# Altium PCB UCC28180 Power Board.PcbDoc
Units mil, origin at the board's own origin, x right, y up, seen from the top; angles counter-clockwise.
Board outline 5303.93 x 3160.03 mil, 2 copper layers (Top Layer, Bottom Layer); 55 components, 25 nets, 123 pads, 14 vias.
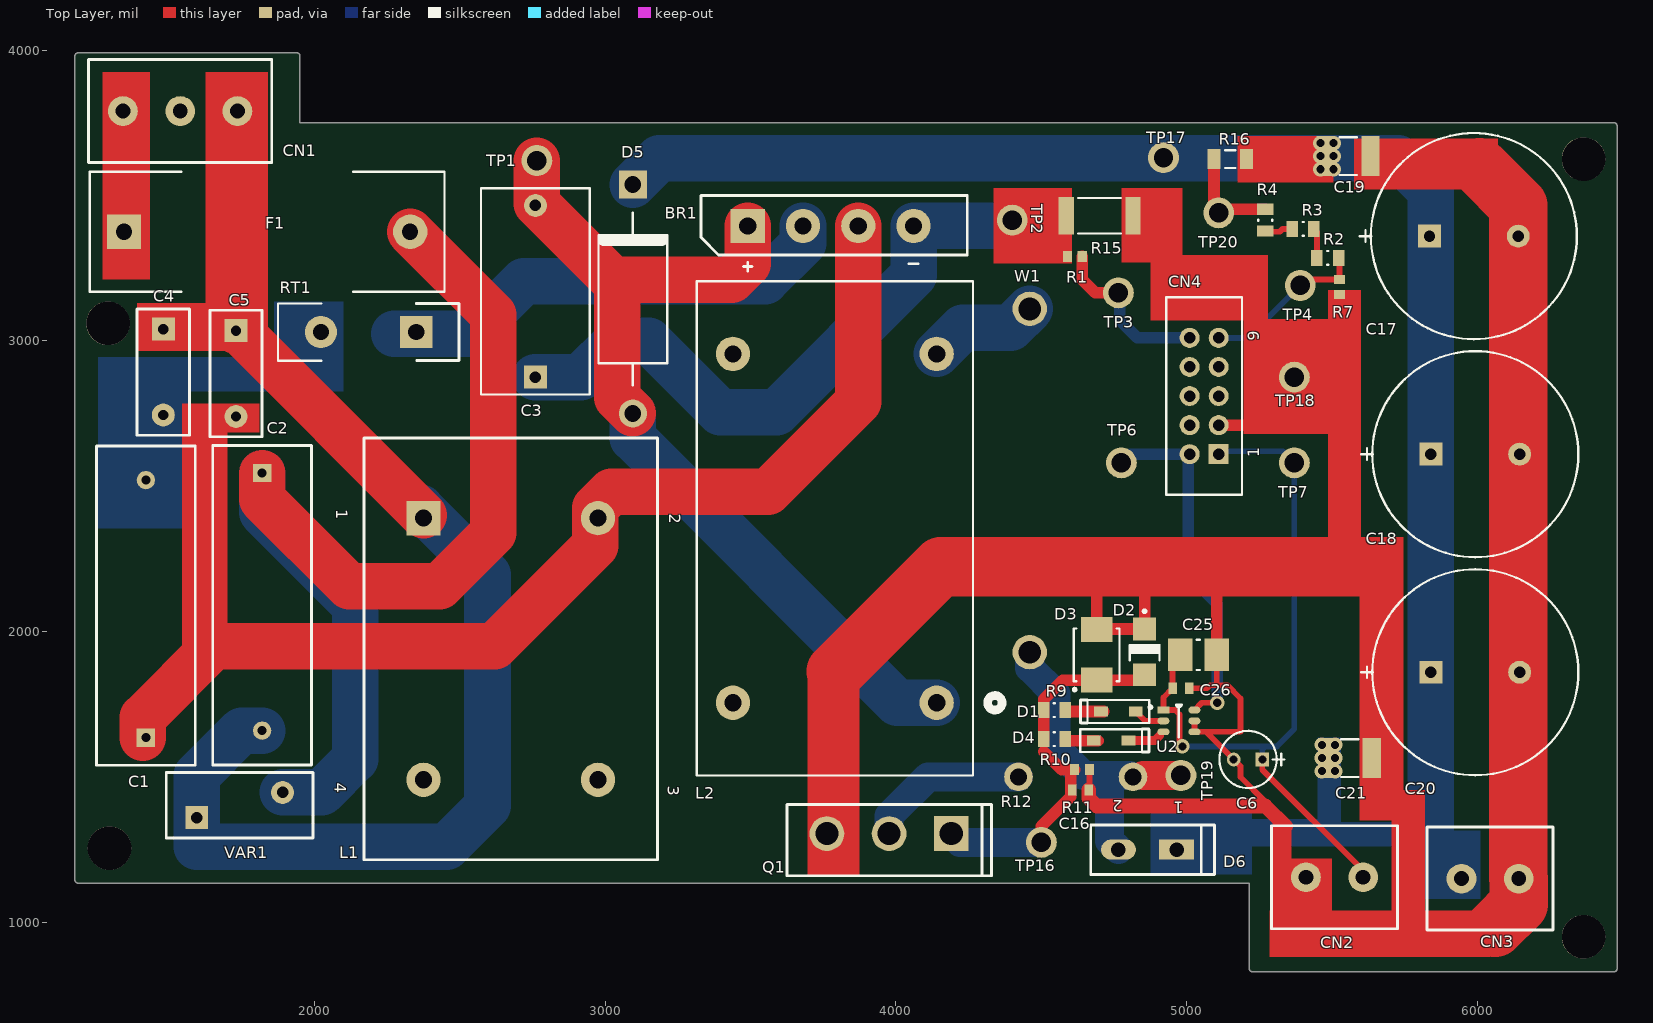
[diagram p0: Top Layer view]
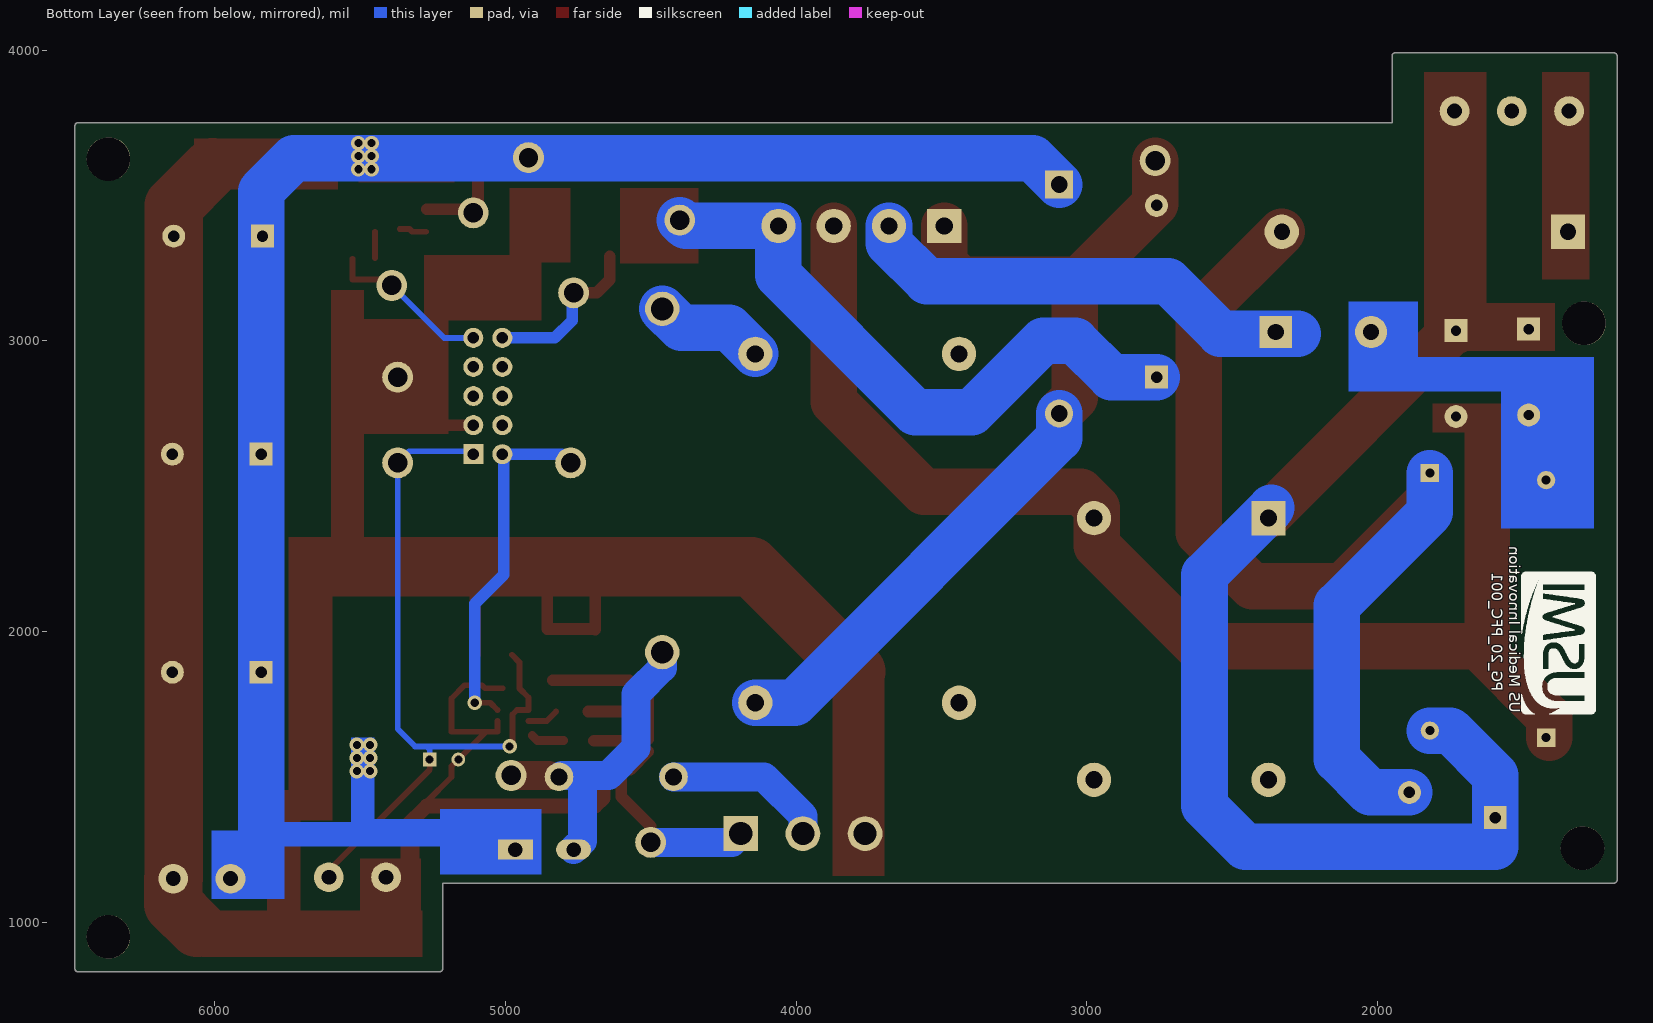
[diagram p1: Bottom Layer view, seen from below]

## Layer stack, top to bottom
Top Solder: solder mask 0.4, Solder Resist, Dk 3.5
Top Layer: signal copper 1.4
Dielectric 1: dielectric 12.6, FR-4, Dk 4.8
Bottom Layer: signal copper 1.4
Bottom Solder: solder mask 0.4, Solder Resist, Dk 3.5

## Board outline
1176.09,1145 1176.09,3980 cw(c1186.1,3980) 1186.65,3990 cw(c1187.2,3980) 1187.2,3990.01 1940,3990.01 cw(c1940,3980) 1950.02,3980 1950.02,3750.01 6470,3750.01 cw(c6470,3740) 6480.02,3740 6480.02,840 cw(c6470,840) 6470,829.99 5225,829.99 cw(c5225,840) 5214.98,840 5214.98,1134.98 1186.1,1134.98 cw(c1186.1,1145)

## Design rules (kind name [scope] priority, off if disabled: settings)
Clearance [All] p1: gap=10
ComponentClearance [All] p1 off: gap=10 collisioncheckmode=3 verticalgap=10 showdistances=FALSE
PolygonConnect [All] p1: connectstyle=Relief reliefconductorwidth=10 reliefentries=4 polygonreliefangle="90 Angle" airgapwidth=10
RoutingVias [All] p1: holewidth=28 width=50 viastyle="Through Hole" minholewidth=28 minwidth=50 maxholewidth=28 maxwidth=50
SolderMaskExpansion [All] p1: expansion=4
Width [All] p1: maxlimit=300 minlimit=10 preferedwidth=10 minimp=50.000000 maximp=50.000000 favimp=50.000000
29 further rules are at their usual default settings.

## Classes and differential pairs
component class "Top Sheet_Power System": CN4 TP3 TP4 TP6 TP7
component class "U_Boost Converter Circuit": C6 C17 C18 C19 C20 C21 CN2 CN3 D5 D6 L2 Q1 R1 R2 R3 R4 R7 R12 R15 R16 TP16 TP17 TP18 TP19 TP20 W1
component class "U_EMI Filter": BR1 C1 C2 C3 C4 C5 CN1 F1 L1 RT1 TP1 TP2 VAR1
component class "U_MOSFET Driver": C16 C25 C26 D1 D2 D3 D4 R9 R10 R11 U2

## Components (designator, comment, footprint, x,y, rotation, side; value= is the part's Value field where it differs from the comment)
BR1 "GBU8J-BP" GBU8J 3490,3395 r0 top
C1 "ECQ-U2A474ML" ECQ-U2A474ML 1420,1635 r90 top
C2 "ECQ-U2A474ML" ECQ-U2A474ML 1820,2545 r270 top
C3 "ECQ-U2A334ML" CAPFILM0.33U 2760,2875 r90 top
C4 "CS11-E2GA222MYNS" CS11-E2GA222MYNS 1480,3040 r270 top
C5 "CS11-E2GA222MYNS" CS11-E2GA222MYNS 1730,3035 r270 top
C6 "ECA-1VM470" CAPALUM47U 5260,1560 r180 top
C16 "10nF" CAP0603 4635,1455 r180 top
C17 "450QXW120MEFC18X31.5" 450QXW120MEFC18X31.5 5835,3360 r0 top
C18 "450QXW120MEFC18X31.5" 450QXW120MEFC18X31.5 5840,2610 r0 top
C19 "GRM43DR72J104KW01L" CAP1812 5555,3635 r180 top
C20 "450QXW120MEFC18X31.5" 450QXW120MEFC18X31.5 5840,1860 r0 top
C21 "GRM43DR72J104KW01L" CAP1812 5560,1565 r180 top
C25 "GRM32RR71H105KA01K" CAP1210 5040,1920 r180 top
C26 "06035C104KAT2A" CAP0603 4980,1805 r180 top
CN1 "1935789" CONN_1935789 1735,3790 r180 top
CN2 "1935776" CONN_1935776 5410,1155 r0 top
CN3 "1935776" CONN_1935776 5945,1150 r0 top
CN4 "MSPV10-ND" MSV10-ND 5060,2810 r90 top
D1 "DB2W40300L" Mini2-F3-B 4765,1725 r180 top
D2 "1SMA12CAT3G" ONSC-SMA-2-403D-02_F_V 4855,1930 r270 top
D3 "1SMB5927BT3G" ONSC-SMB-2-403A-03_H_V 4690,1920 r90 top
D4 "DB2W40300L" Mini2-F3-B 4740,1625 r0 top
D5 "1N5406RLG" 1N5406-DO201AD 3095,2750 r90 top
D6 "C3D04060A" C3D04060A 4965,1250 r180 top
F1 "FUSE" 0031.8211 1345,3375 r0 top
L1 "8113-RC" 8113-RC 2375,2390 r270 top
L2 "51-1785LF" G-51-185LF 4140,1755 r90 top
Q1 "C3M0065090D" TO-247-3 4190,1305 r180 top
R1 "CRCW0603221RFKEA" RES0603 4615,3290 r0 top
R2 "CRCW0805340KFKEA" RES0805 5485,3285 r0 top
R3 "CRCW0805332KFKEA" RES0805 5400,3385 r0 top
R4 "CRCW0805332KFKEA" RES0805 5270,3415 r270 top
R7 "CRCW060313K3FKEA" RES0603 5525,3185 r270 top
R9 "CRCW0805R10" RES0805 4545,1730 r0 top
R10 "CRCW0805R4.99" RES0805 4545,1630 r0 top
R11 "CRCW0603RES10K" RES0603 4640,1525 r0 top
R12 "CRCWRSHUNT" Wire-Sense 4815,1500 r180 top
R15 "CRCW2512R0.027" RES2512 4700,3430 r180 top
R16 "CRCW120649R9FKEA" RES1206 5150,3625 r180 top
RT1 "CL-40" CL-40 2350,3030 r180 top
TP1 "5006" "Test Point" 2765,3620 r90 top
TP2 "5006" "Test Point" 4400,3415 r90 top
TP3 "5006" "Test Point" 4765,3165 r0 top
TP4 "5006" "Test Point" 5390.3,3190.3 r0 top
TP6 "5006" "Test Point" 4775,2580 r270 top
TP7 "5006" "Test Point" 5370,2580 r0 top
TP16 "5006" "Test Point" 4500,1275 r90 top
TP17 "5006" "Test Point" 4920,3630 r90 top
TP18 "5006" "Test Point" 5370,2875 r0 top
TP19 "5006" "Test Point" 4980,1505 r90 top
TP20 "5006" "Test Point" 5110,3440 r180 top
U2 "UCC27511DBV" SOP6 4920,1730 r0 top
VAR1 "S10K275E2" S10K275E2 1595,1360 r0 top
W1 "Wire" "Current Sense Wire" 4460,3110 r270 top

## Footprints (in the part's own frame and the unit in brackets; to place one, negate y for a bottom-side part, rotate by r counter-clockwise, add the part's x,y. Pads: shape width x height; smd on the part's side, far side on the other; paste and mask are expansions set on the pad)
1N5406-DO201AD [mm] "Diode"
  rect 2.45x2.45 hole 1.45: 1(20,0)
  round 2.45 hole 1.45: 2(0,0)
  silkscreen extent 2.45,-3 17.55,3
0031.8211 [mm] "Fuse Holder"
  rect 3x3 hole 1.4: 1(0,0)
  round 3 hole 1.4: 2(25,0)
  silkscreen extent -3,-5.25 28,5.25, body extent 0.8,-4.62 24.9,4.98, height 11.51
450QXW120MEFC18X31.5 [mm] "Radial Electrolytic Capacitor"
  rect 2x2 hole 1: 1(0,0)
  round 2 hole 1: 2(7.75,0)
  silkscreen extent -6.1,-9 12.87,9, body extent -5.24,-9.25 12.96,8.94, height 39.75
8113-RC [mm] "EMI Choke"
  rect 3x3 hole 1.5: 1(0,0)
  round 3 hole 1.5: 2(0,15.24) 3(22.86,15.24) 4(22.86,0)
  silkscreen extent -6.99,-5.21 29.84,20.45
C3D04060A [mil] "Schotky diode"
  rect 120x69.69 hole 50: 1(0,0)
  oval 120x69.69 hole 50: 2(200,0)
  silkscreen extent -130,-85 295,85
CAP0603 [mm]
  rect 0.75x1 smd: 1(-0.725,0) 2(0.725,0)
  body extent -0.87,-0.48 0.87,0.47, height 0.5
CAP1210 [mm] "Capacitor"
  rect 2.15x2.85 smd: 1(-1.6,0) 2(1.6,0)
  silkscreen extent -0.15,-1.32 0.15,1.33, body extent -2.25,-1.4 2.25,1.4, height 2
CAP1812 [mm] "Capacitor"
  rect 1.6x3.5 smd: 1(-1.95,0) 2(1.95,0)
  silkscreen extent -0.75,-1.65 0.75,1.65, body extent -2.4,-1.75 2.4,1.75, height 0.7
CAPALUM47U [mm] "Aluminum Capacitor"
  rect 1.2x1.2 hole 0.7: 1(0,0)
  round 1.2 hole 0.7: 2(2.5,0)
  silkscreen extent -1.93,-2.5 3.75,2.5, body extent -1.38,-2.54 3.82,2.66, height 11.5
CAPFILM0.33U [mm] "Film Capacitor"
  rect 2x2 hole 1: 1(0,0)
  round 2 hole 1: 2(15,0)
  silkscreen extent -1.52,-4.75 16.51,4.75
CL-40 [mm] "NTC Thermistor"
  rect 2.8x2.8 hole 1.4: 1(0,0)
  round 2.8 hole 1.4: 2(8.33,0)
  silkscreen extent -3.75,-2.5 12.08,2.5
CONN_1935776 [mm] "2 Pin Connector"
  round 2.6 hole 1.3: 1(0,0) 2(5,0)
  silkscreen extent -3,-4.5 8,4.5, body extent -3.2,-5.2 7.4,4.6, height 13.81
CONN_1935789 [mm] "3 Pin Connector"
  round 2.6 hole 1.3: 1(0,0) 2(5,0) 3(10,0)
  silkscreen extent -3,-4.5 13,4.5
CS11-E2GA222MYNS [mm] "Disc Cap"
  rect 2x2 hole 0.9: 1(0,0)
  round 2 hole 0.9: 2(7.5,0)
  silkscreen extent -1.78,-2.29 9.27,2.29
"Current Sense Wire" [mm]
  round 3 hole 2: 1(0,0) 2(30,0)
ECQ-U2A474ML [mm] "Film Capacitor"
  rect 1.6x1.6 hole 0.8: 1(0,0)
  round 1.6 hole 0.8: 2(22.5,0)
  silkscreen extent -2.41,-4.32 25.49,4.32
G-51-185LF [mm] "Gowanda Inductor"
  round 3 hole 1.5: 1(0,0) 2(30.48,0) 3(30.48,17.8) 4(0,17.8)
  silkscreen extent -6.35,-5.71 36.83,20.96
GBU8J [mm] "Bridge rectifier"
  rect 3x3 hole 1.5: 1(0,0)
  round 3 hole 1.5: 2(4.83,0) 3(9.66,0) 4(14.49,0)
  silkscreen extent -4.06,-3.94 19.18,2.67
Mini2-F3-B [mm] "Schottky Diode"
  rect 1.2x0.85 smd: 1(1.525,0) 3(-1.525,0)
  silkscreen extent -2.7,-1.02 3.3,1
MSV10-ND [mm] "CONN SOCKET PCB VERT 10POS .1"
  rect 1.75x1.75 hole 1: 1(-5.08,-1.27)
  round 1.75 hole 1: 2(-5.08,1.27) 3(-2.54,-1.27) 4(-2.54,1.27) 5(0,-1.27) 6(0,1.27) 7(2.54,-1.27) 8(2.54,1.27) 9(5.08,-1.27) 10(5.08,1.27)
  silkscreen extent -8.64,-3.3 8.64,3.3
ONSC-SMA-2-403D-02_F_V [mm] "Molded, 2-Leads, Body 4.32x2.6mm"
  rect 2x2 smd: 1(-2,0) 2(2,0)
  silkscreen extent -3.67,-1.3 0.74,1.3, body extent -2.16,-1.3 2.16,1.3, height 2.2
ONSC-SMB-2-403A-03_H_V [mil] "Molded, 2-Leads, Body 4.6x3.95mm"
  rect 85x107.99 smd: 1(-87.01,0) 2(87.01,0)
  silkscreen extent -125,-79 91,81, body extent -91,-78 91,78, height 95
RES0603 [mm]
  rect 0.8x0.95 smd: 1(-0.65,0) 2(0.65,0)
  body extent -0.83,-0.48 0.82,0.48, height 0.5
RES0805 [mm]
  rect 1x1.4 smd: 1(-0.95,0) 2(0.95,0)
  silkscreen extent -0.05,-0.6 0.05,0.6, body extent -1.1,-0.7 1.1,0.7, height 0.5
RES1206 [mm]
  rect 1.15x1.75 smd: 1(-1.425,0) 2(1.425,0)
  silkscreen extent -0.45,-0.77 0.45,0.77, body extent -1.65,-0.87 1.65,0.87, height 0.5
RES2512 [mm]
  rect 1.35x3.3 smd: 1(-2.925,0) 2(2.925,0)
  silkscreen extent -1.85,-1.55 1.85,1.55, body extent -3.25,-1.65 3.25,1.65, height 0.7
S10K275E2 [mm] "Varistor"
  rect 2x2 hole 1: 1(0,0)
  round 2 hole 1: 2(7.5,2.2)
  silkscreen extent -2.67,-1.78 10.16,3.94
SOP6 [mm]
  rect 1.05x0.6 smd: 1(0,0)
  oval 1.05x0.6 smd: 2(0,-0.95) 3(0,-1.9) 4(2.7,-1.9) 5(2.7,-0.95) 6(2.7,0)
  silkscreen extent -1.27,-2.38 1.59,0.48, body extent 0.67,-2.34 2.02,0.46, height 2
"Test Point" [mm] "Test Point"
  round 2.7 hole 1.7: 1(0,0)
  body extent -1.63,-1.5 1.55,1.68, height 5.49
TO-247-3 [mm] "Transistor"
  rect 3.04x3.04 hole 2.03: 1(0,0)
  round 3.04 hole 2.03: 2(5.43,0) 3(10.86,0)
  silkscreen extent -3.5,-2.54 14.36,3.68
Wire-Sense [mm] "Current Sense"
  round 2.5 hole 1.5: 1(0,0) 2(10,0)

## Part data
BR1: "RECT BRIDGE GPP 8A 600V GBU"
C1 C2: "CAP FILM 0.47UF 20% 275VAC RAD"
C3: "CAP FILM 0.33UF 20% 275VAC RAD"
C4 C5: "CAP CER 2200PF 250VAC RADIAL"
C6: "CAP ALUM 47UF 20% 35V RADIAL"
C16: library part C0603C103F3GACTU, "CAP CER 10000PF 25V C0G/NP0 0603"
C19 C21: "CAP CER 0.1UF 630V X7R 1812"
C25: "CAP CER 1UF 50V X7R 1210"
C26: "CAP CER 0.1UF 50V X7R 0603"
CN1: "CONN TERM BLOCK 3POS 5.0MM"
CN2 CN3: "CONN TERM BLOCK 2POS 5.0MM"
CN4: "CONN SOCKET PCB VERT 10POS .1\""
D2: "400 W Peak Power Zener Transient Voltage Suppressor, 2-Pin SMA, Pb-Free, Tape and Reel"
D3: "3 W Zener Voltage Regulator, 2-Pin SMB, Pb-Free, Tape and Reel"
D5: "DIODE GEN PURP 600V 3A DO201AD"
D6: "DIODE SCHOTTKY 600V 4A TO220-2"
L1: "CMC 5MH 8.9A 2LN TH"
Q1: "MOSFET N-CH 900V 36A TO247-3"
R1: "RES SMD 221 OHM 1% 1/10W 0603"
R2: "RES SMD 340K OHM 1% 1/8W 0805"
R3 R4: "RES SMD 332K OHM 1% 1/8W 0805"
R7: "RES SMD 13.3K OHM 1% 1/10W 0603"
R16: "RES SMD 49.9 OHM 1% 1/4W 1206"
RT1: "ICL 5 OHM 25% 6A 19.56MM"
TP1 TP2 TP3 TP4 TP6 TP7 TP16 TP17 TP18 TP19 TP20: "TEST POINT PC COMPACT .063\"D BLK"
VAR1: "VARISTOR 430V 3.5KA DISC 10MM"

## Free pads (board coordinates)
  round 150 hole 150: 1(1295,1255) 2(6365,950) 3(6365,3625) 4(1290,3060)

## Via types
v1: diameter 50, hole 28, Top Layer to Bottom Layer, 13 vias
v2: diameter 50, hole 28, Top Layer to Bottom Layer, tented both sides, 1 vias

## Nets (pads, with @x,y where several pads share a name; then routed paths per layer and width w, separated by ;. In a path a pad name is that pad's centre, name@x,y a point inside that pad or via, vN(x,y) a via of type N, cw(c..) or ccw(c..) an arc to the next point about the centre after c; other vN are vias at no path point)
EARTH: C2.2 C4.1 C5.1 CN1.1 L1.1 VAR1.1 | length 3620.1
  Top Layer w160: C5.1 1740,3035 L1.1@2375,2400
  Bottom Layer w160: C2.2 1749.17,1659.17 1595,1505 VAR1.1 1595,1260 2455,1260 2595,1400 2595,2195 L1.1@2365,2425
GND: C6.2 C16.1 C17.2 C18.2 C19.1 C20.2 C21.1 C25.1 C26.1 CN2.1 CN3.2 CN4.3 D2.1 D3.2 Q1.3 R7.2 R11.2 R15.1 TP18.1 U2.4 U2.5 | length 5752.8
  Top Layer w20: C16.1@4658.54,1455 4665.59,1462.05 R11.2 ; C26.1 5070,1805 5080,1815 5140,1815 5185,1770 5185,1655.2 5066.38,1655.2 ; U2.5 U2.4 5066.38,1655.2 ; 5102.99,1815 C25.1 ; 5270,1400 5270,1415 5185,1500 5185,1536.57 C6.2 5066.38,1655.2
  Top Layer w40: 4690,2150 D3.2 4691.73,2008.74 D2.1 4855,2140 ; C25.1 5102.99,2142.99 ; CN4.3 5210,2710
  Top Layer w50: C16.1 4663.54,1426.46 4690,1400 5270,1400 5340,1330
  Top Layer w200: 3792.5,1862.5 4155,2225 ; 6007.5,3597.5 6140.12,3464.88 C17.2 CN3.2@6140.12,1151.73 ; 6060,980 6141.85,1061.85 CN3.2
LINE: CN1.3 F1.1
NetBR1_1: BR1.1 C3.2 D5.2 L2.1 TP1.1 | length 3130.9
  Top Layer w160: TP1.1 2765,3470.55 3040.55,3195 ; D5.2 3040.55,2804.45 3040.55,3210 3435,3210 3490,3265 BR1.1
  Bottom Layer w160: D5.2 3095,2665 4005,1755 L2.1
NetBR1_2: BR1.2 RT1.1 | length 1593.5
  Bottom Layer w160: 2275,3025 2540,3025 2720,3205 3550,3205 3680.16,3335.16 BR1.2
NetBR1_3: BR1.3 C1.1 C5.2 L1.2 | length 3660.6
  Top Layer w160: C1.1@1410,1635 1410,1705 1655,1950 2620,1950 2965,2295 2965,2425 3020,2480 3560,2480 3870,2790 BR1.3@3870,3395
NetBR1_4: BR1.4 C3.1 R1.1 R15.2 TP2.1 | length 2165.9
  Bottom Layer w160: C3.1 2915,2875 3040,3000 3150,3000 3395,2755 3590,2755 4060.47,3225.47 BR1.4 4380,3395 TP2.1
NetC1_2: C1.2 C4.2 RT1.2
NetC2_1: C2.1 F1.2 VAR1.2 | length 3652.5
  Top Layer w160: C2.1 1820,2455 2120,2155 2430,2155 2615,2340 2615,3089.25 F1.2
  Bottom Layer w160: C2.1 1820,2410 2140,2090 2140,1561.61 2025,1446.61 VAR1.2
NetC16_2: C16.2 D2.2 D3.1 Q1.1 R9.1 R10.1 R11.1 TP16.1 | length 1173
  Top Layer w40: 4500,1330 4601.46,1431.46 4601.46,1455 R11.1@4601.46,1512.05 ; 4507.6,1587.4 4570,1525 R11.1 ; R10.1 R9.1 4507.6,1767.6 4572.99,1832.99 D3.1 D2.2@4836.73,1832.99
  Bottom Layer w100: Q1.1 4220,1275 TP16.1
NetCN4_2: CN4.2 TP6.1 U2.6 | length 1235
  Top Layer w20: U2.6 5051.3,1755 v1(5105,1755)
  Bottom Layer w40: TP6.1 4805,2610 CN4.2 5005,2605 5005,2195 5105,2095 v1(5105,1755)
NetCN4_9: CN4.9 R2.2 R7.1 TP4.1 | length 545.6
  Top Layer w20: TP4.1 5410.59,3210.59 R7.1 R2.2@5525,3282.4
  Bottom Layer w20: CN4.9 5210,3010 5362.5,3162.5 TP4.1@5377.5,3162.5
NetCN4_10: CN4.10 R1.2 TP3.1 | length 583.2
  Top Layer w40: R1.2 4640.59,3209.41 4685,3165 TP3.1
  Bottom Layer w40: TP3.1@4770,3165 4770,3070 4830,3010 CN4.10
NetD1_1: D1.1 R9.2 | length 132.6
  Top Layer w40: R9.2@4582.4,1725 D1.1@4715,1725
NetD1_3: D1.3 U2.2 | length 108.4
  Top Layer w20: D1.3 4857.44,1692.6 U2.2
NetD4_1: D4.1 U2.3 | length 114.7
  Top Layer w30: D4.1 4889.8,1625 4907.4,1642.6
NetD4_3: D4.3 R10.2 | length 112.6
  Top Layer w40: R10.2@4582.4,1625 D4.3@4695,1625
NetD6_2: D6.2 R12.1 TP19.1 W1.2 | length 1053
  Top Layer w100: R12.1@4850,1505 TP19.1
  Bottom Layer w100: W1.2 4460,1875 4550,1785 4550,1600 4645,1505 4735,1505 4735,1280 D6.2 ; 4740,1505 R12.1@4805,1505
NetL2_2: L2.2 W1.1 | length 384.2
  Bottom Layer w160: L2.2 4230,3045 4395,3045 W1.1
NetQ1_2: Q1.2 R12.2 | length 561.7
  Bottom Layer w100: Q1.2 3976.22,1366.22 4110,1500 R12.2
NetR2_1: R2.1 R3.2 | length 89.8
  Top Layer w20: R2.1 R3.2@5447.6,3374.8
NetR3_1: R3.1 R4.2 | length 94.1
  Top Layer w20: R4.2@5272.6,3375 5320,3375 5330,3385 R3.1
NetR4_1: R4.1 R16.2 TP20.1 | length 319
  Top Layer w20: TP20.1@5125,3440 TP20.1@5137.4,3452.4
  Top Layer w40: TP20.1@5093.9,3456.1 R16.2 ; TP20.1@5137.4,3452.4 R4.1
VCC: C6.1 C25.2 C26.2 CN2.2 CN4.1 TP7.1 U2.1 | length 2612.3
  Top Layer w20: C25.2 4951.46,1894.45 C26.2 4920,1773.54 U2.1 4960,1730 4975,1715 4975,1615 v2(4985,1605) ; C6.1 5260,1525 5606.85,1178.15 CN2.2 CN2.2@5606.85,1140
  Bottom Layer w20: v2(4985,1605) 5270,1605 ; CN4.1 5120,2620 5330,2620 TP7.1 5370,1875 5370,1665 5310,1605 5270,1605 ; C6.1@5260,1555 5260,1595 5270,1605
VOUT: C17.1 C18.1 C19.2 C20.1 C21.2 CN3.1 D5.1 D6.1 R16.1 TP17.1 | length 5043.8
  Bottom Layer w160: D5.1 3185,3627.4 5727.6,3627.4 5840,3515 5840,1300
  other v1: 5465,1520 5510,1520 5465,1565 5510,1565 5465,1610 5510,1610 5460,3590 5505,3590 5460,3635 5505,3635 5460,3680 5505,3680
pads on no net: CN1.2 CN4.4 CN4.5 CN4.6 CN4.7 CN4.8 L1.3 L1.4 L2.3 L2.4

## Other copper
Top Layer:
  rectangle net GND: 5195,2680 5485,3075
  rectangle net GND: 5485,2320 5600,3175
  rectangle net VOUT: 5175,3545 5505,3705
  rectangle net GND: 4140,2120 5745,2325
  rectangle net GND: 3695,1160 3875,1865
  rectangle net GND: 5705,1040 5820,1455
  rectangle net GND: 5595,1350 5745,2120
  rectangle net GND: 5290,960 5500,1220
  rectangle net GND: 5285,880 6045,1040
  rectangle net EARTH: 1625,3130 1840,3925
  rectangle net NetBR1_3: 1545,1875 1700,2785
  rectangle net EARTH: 1390,2965 1840,3130
  rectangle net LINE: 1270,3210 1435,3925
  rectangle net GND: 5575,3520 6070,3695
  rectangle net GND: 5295,1220 5360,1340
  rectangle net GND: 4875,3070 5280,3295
  rectangle net GND: 4775,3270 4985,3525
  rectangle net NetBR1_4: 4335,3265 4605,3525
  rectangle net NetBR1_3: 1700,2685 1810,2785
Bottom Layer:
  rectangle net VOUT: 5530,1260 5765,1345
  rectangle net VOUT: 5225,1260 5450,1355
  rectangle net VOUT: 4875,1165 5225,1390
  rectangle net VOUT: 5450,1260 5530,1635
  rectangle net VOUT: 5760,1080 6010,1315
  rectangle net NetC1_2: 1255,2825 2070,2945
  rectangle net NetC1_2: 1255,2355 1575,2825
  rectangle net NetC1_2: 1860,2825 2100,3135

## Silkscreen, mask and mechanical layers (free items; w line width, h text height)
Bottom Overlay:
  drawing of 1445 lines, arcs and shapes, not listed
  text "PG_20_PFC_001" at 1620,1795 h65 r90
  text "US Medical Innovation" at 1560,1720 h65 r90
Mechanical 10:
  lines w20: 1186.1,3980 1186.1,1145 5225,1145 5225,840 6470,840 6470,3740 1940,3740 1940,3980 1187.2,3980

## Text inside footprints (layer, text, board x,y; h text height)
CN4: Top Overlay "9" at 5250,3000 h39.37 r90; Top Overlay "1" at 5250,2600 h39.37 r90
D6: Top Overlay "1" at 4990,1415 h40 r180; Top Overlay "2" at 4780,1420 h40 r180
L1: Top Overlay "1" at 2075,2420 h40 r270; Top Overlay "4" at 2070,1480 h40 r270; Top Overlay "3" at 3215,1470 h40 r270; Top Overlay "2" at 3220,2405 h40 r270